# Altium PCB Board Connector Template.PcbDoc
Units mil, origin at the board's own origin, x right, y up, seen from the top; angles counter-clockwise.
Board outline 3937.01 x 3937.01 mil, 4 copper layers (Top Layer, Ground Plane, Power Plane, Bottom Layer), stack 62.449 mil thick; 8 components, 8 nets, 64 pads, 0 vias.
Unrouted connection lines stored in the file: 52.
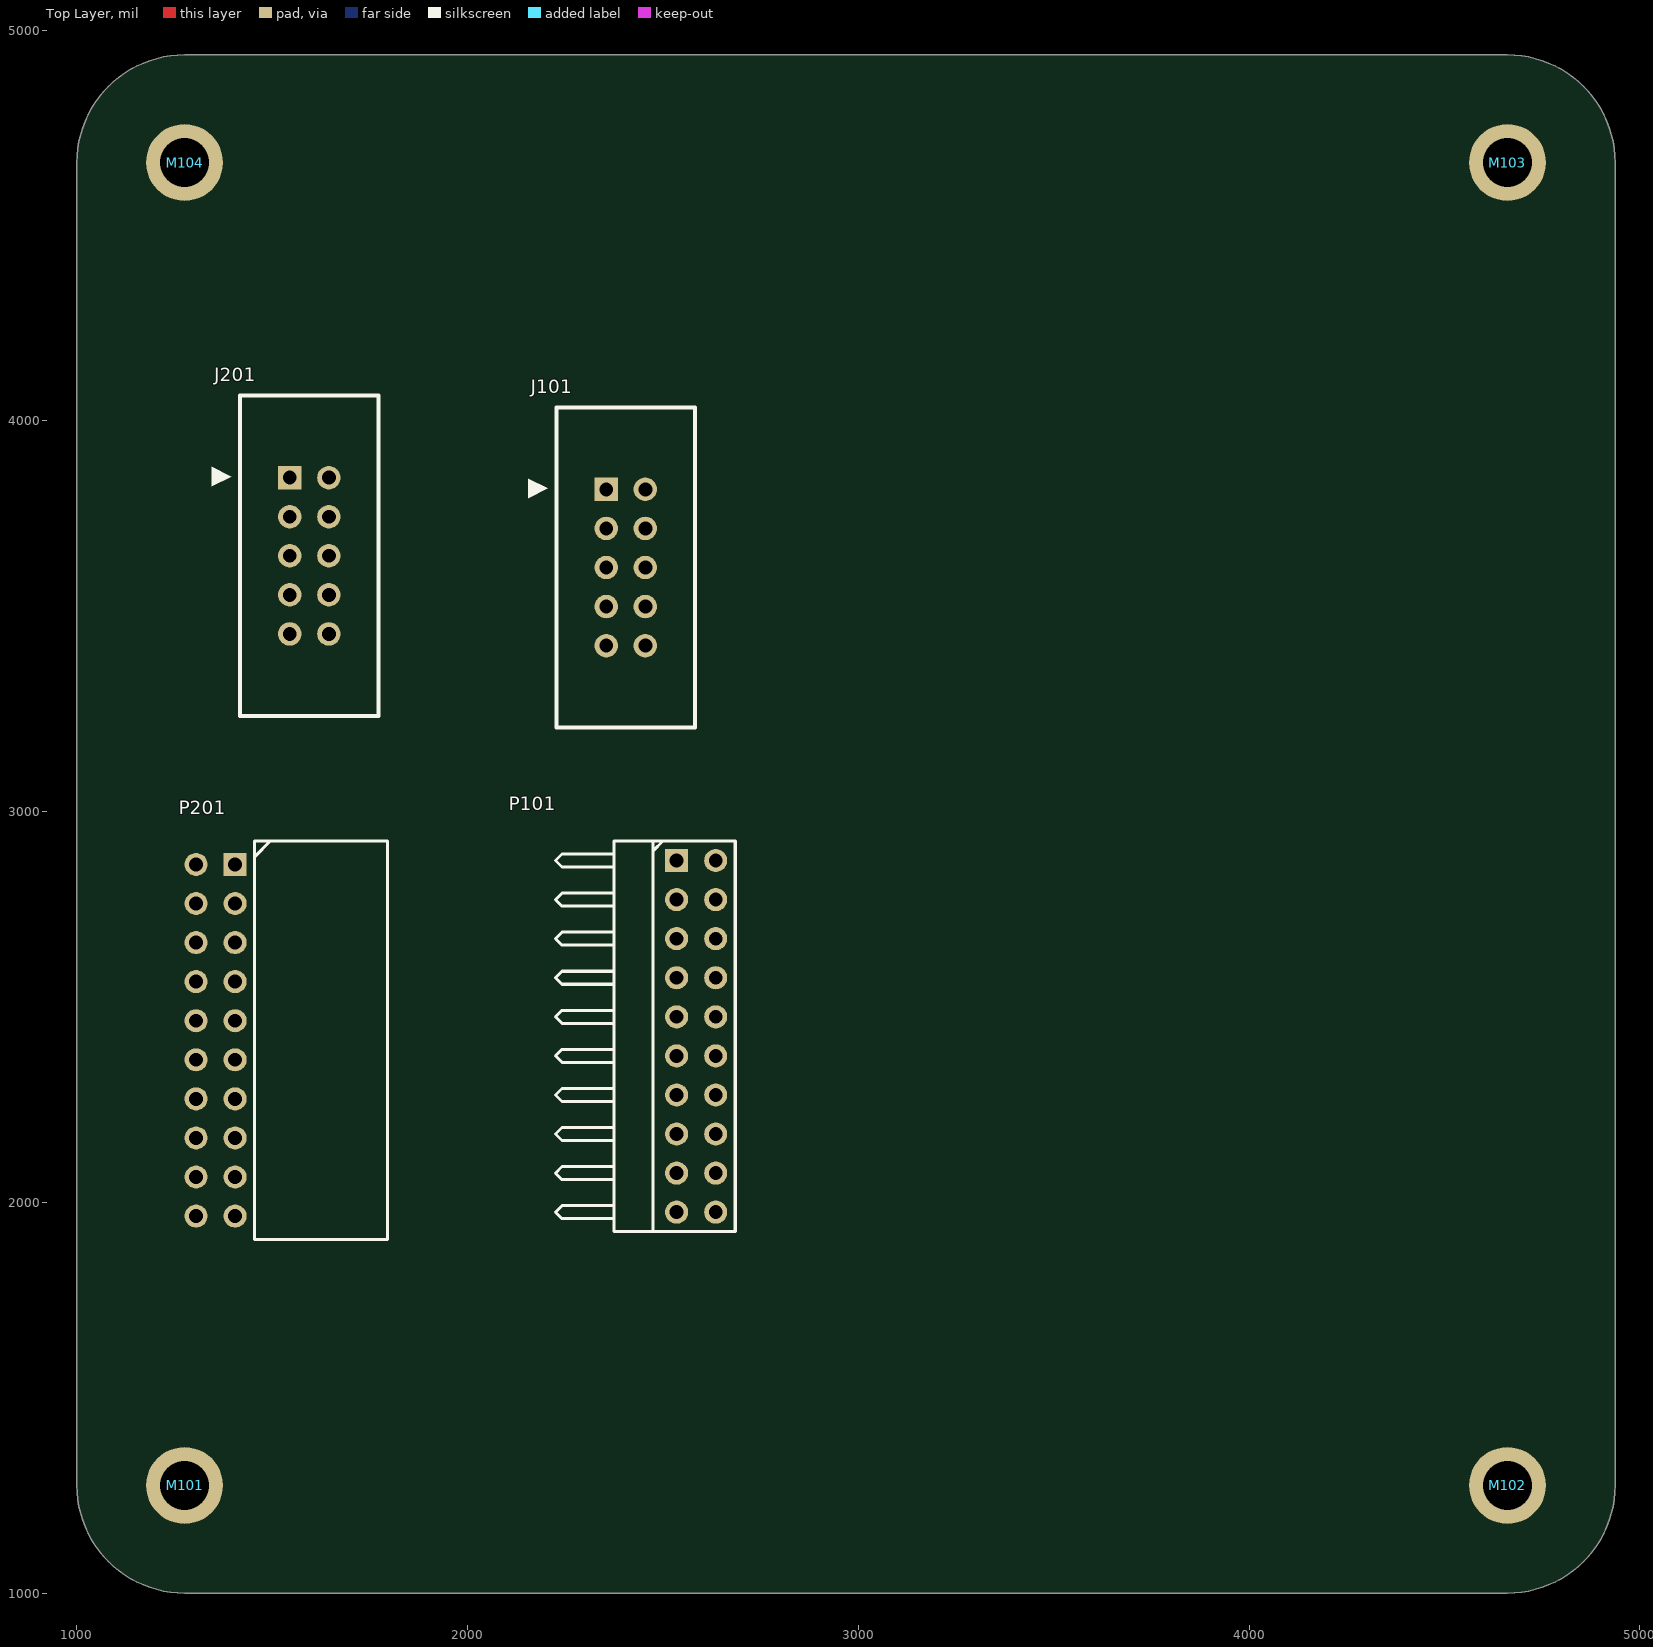
[diagram p0: Top Layer view]
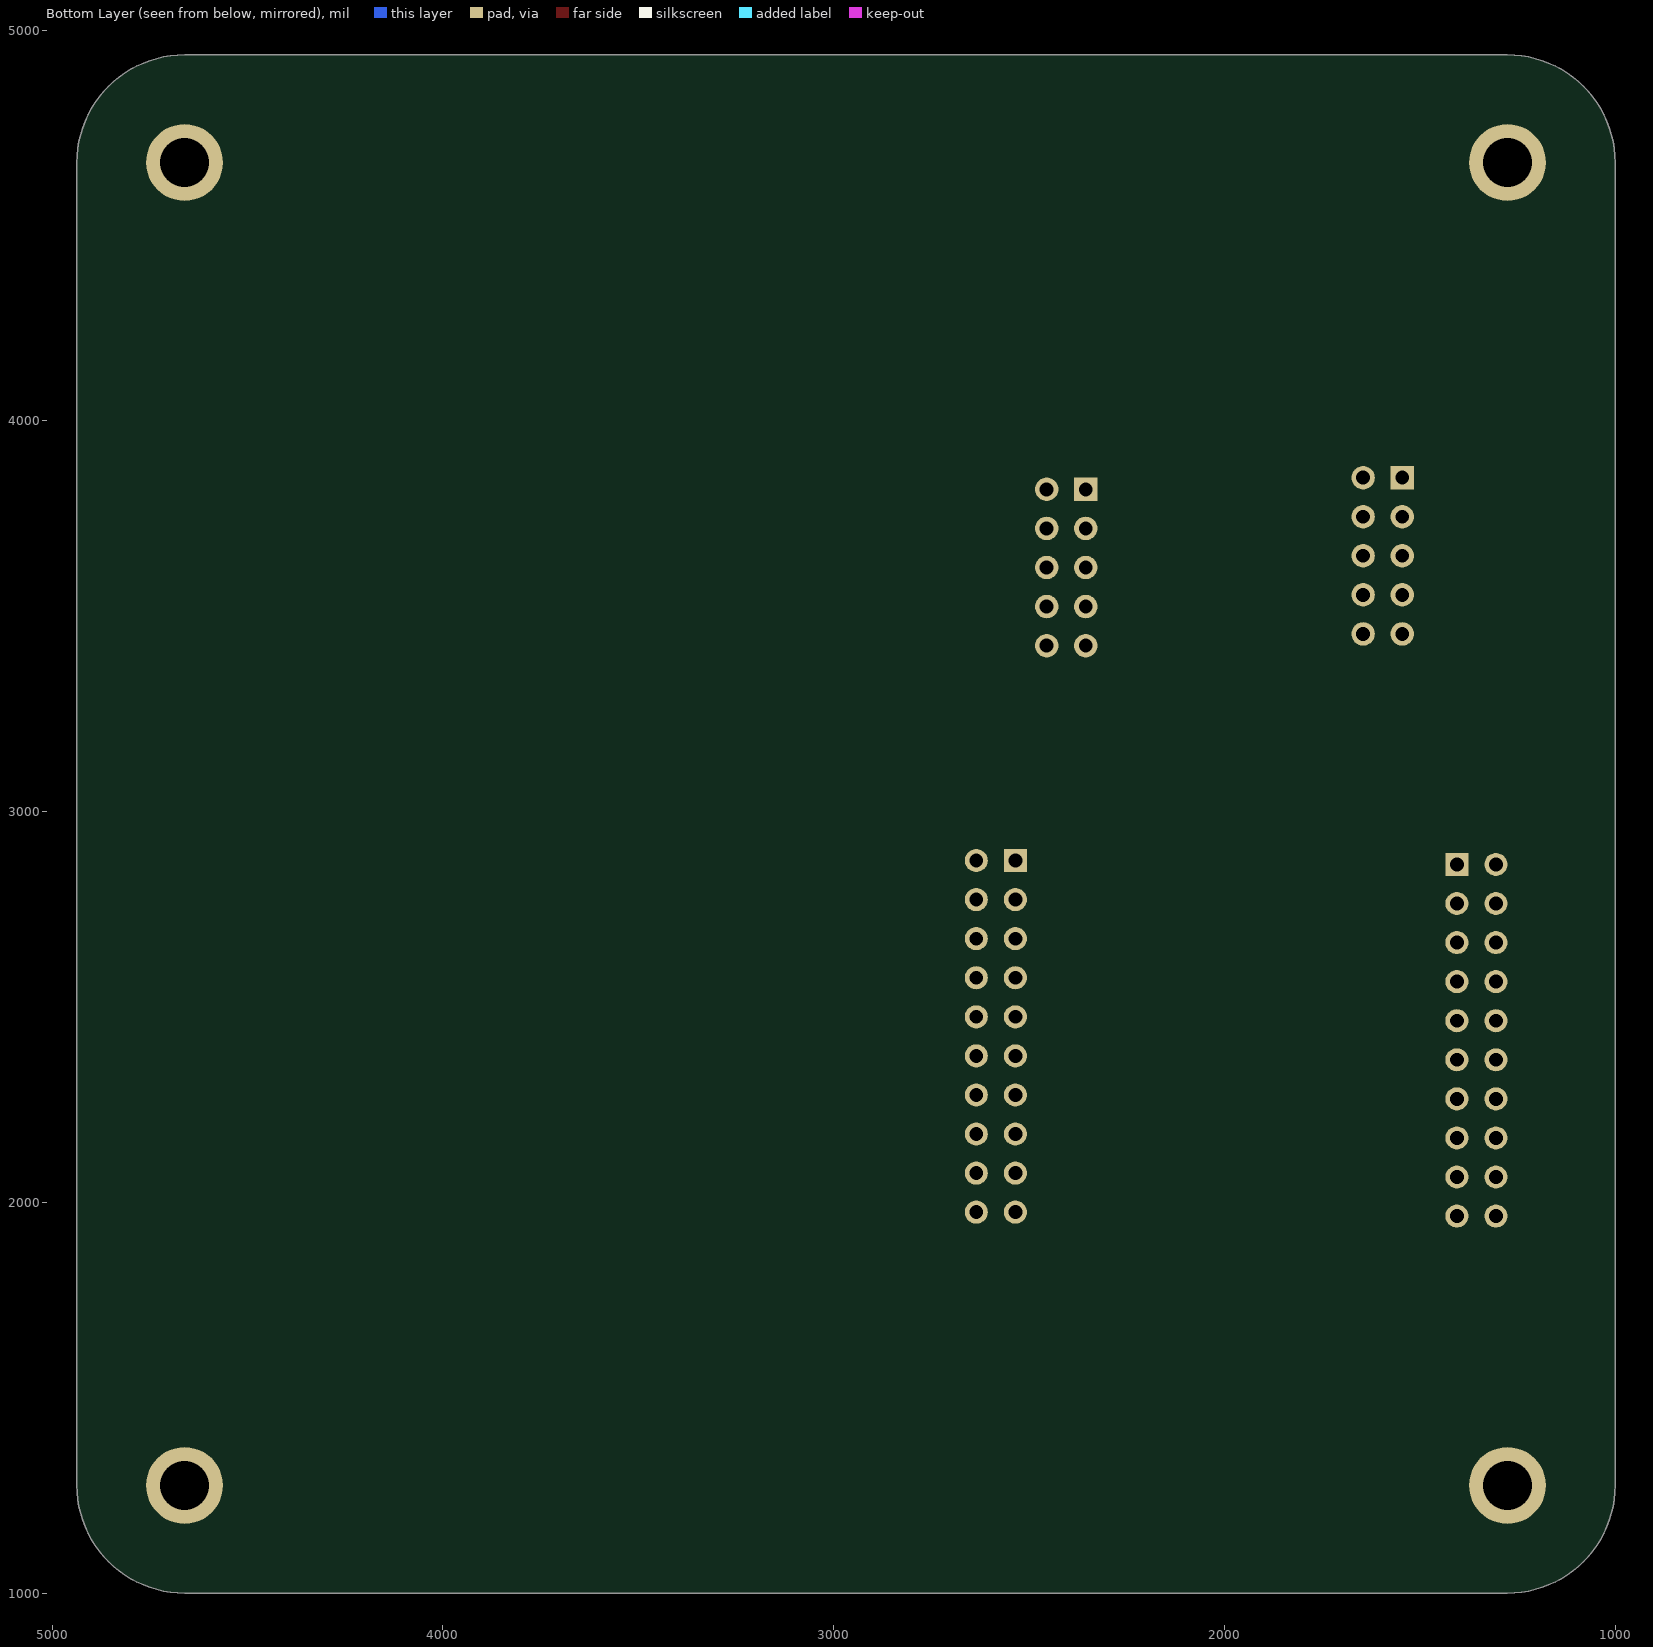
[diagram p1: Bottom Layer view, seen from below]
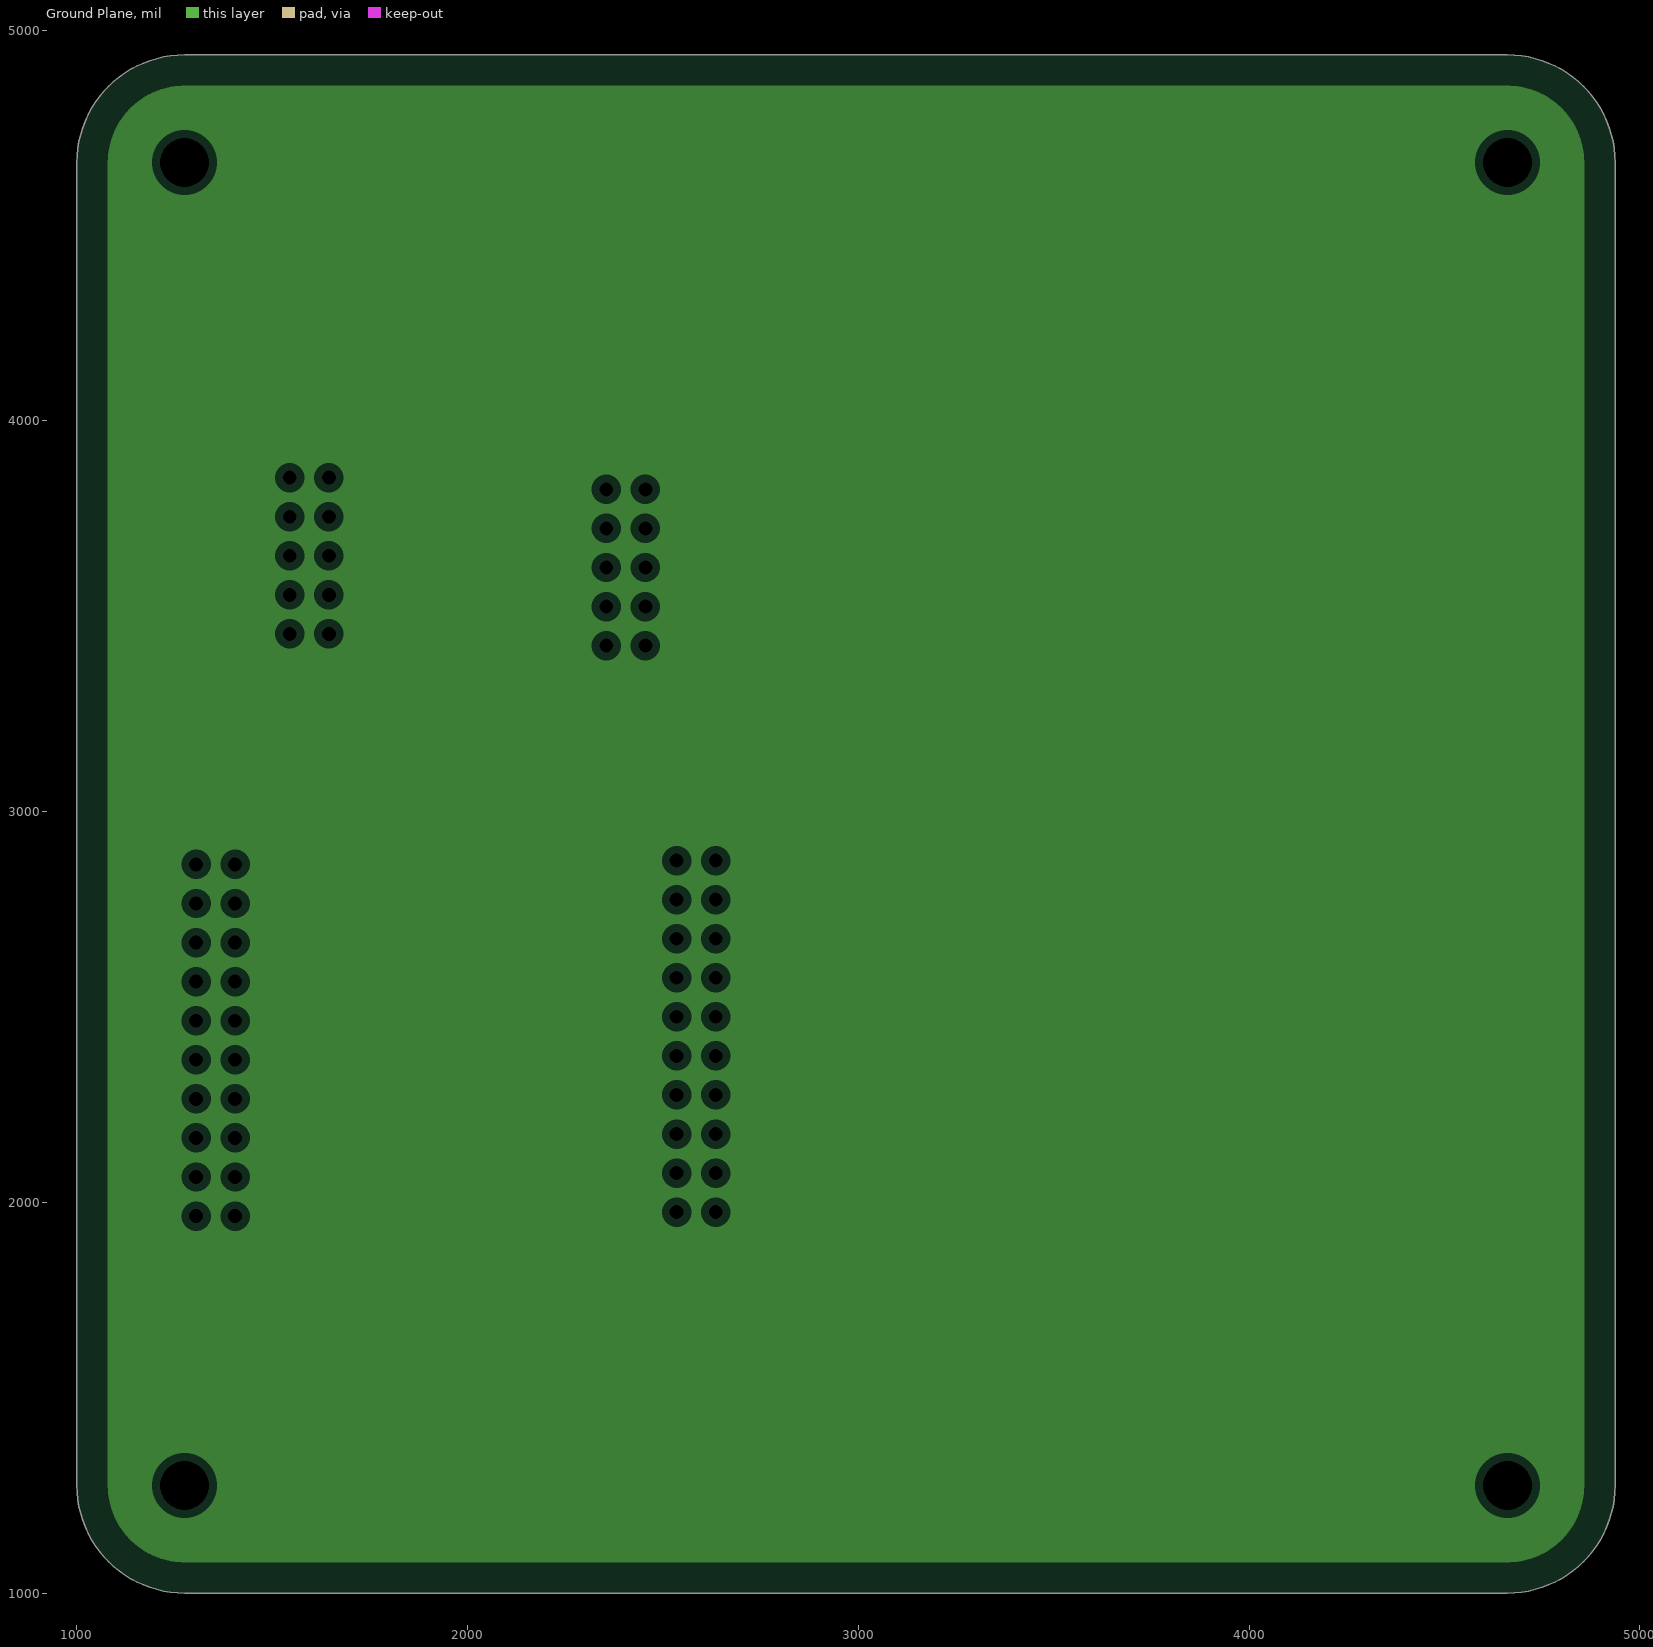
[diagram p2: Ground Plane, clearances drawn from the general rule]
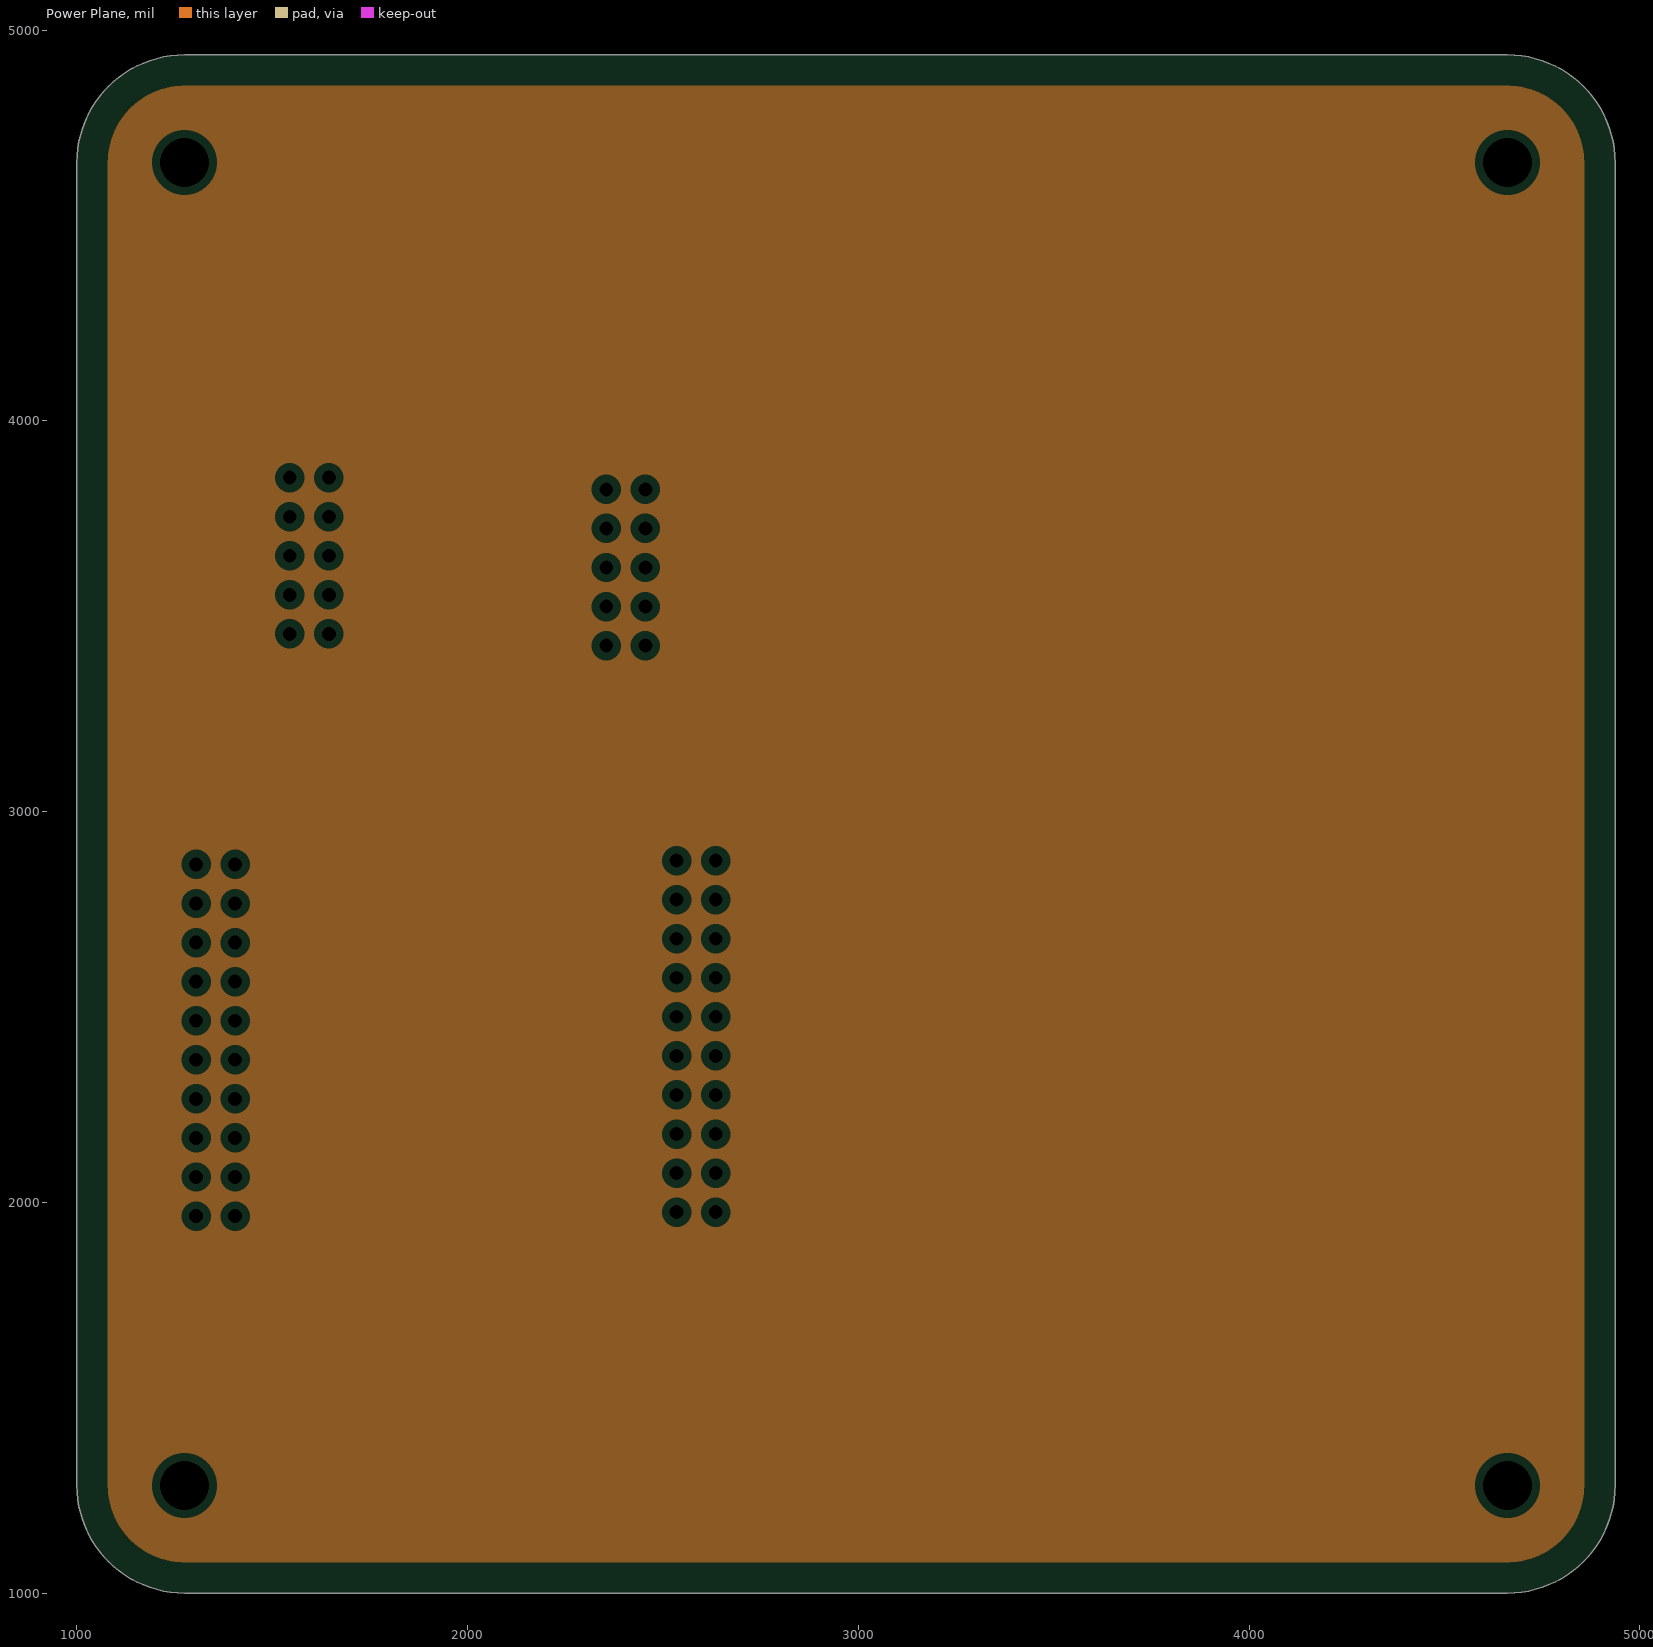
[diagram p3: Power Plane, clearances drawn from the general rule]

## Layer stack, top to bottom
Top Solder: solder mask 0.5, Solder Resist, Dk 3.8
Top Layer: signal copper 1.378
Dielectric 1: prepreg 8.284, 7628, Dk 4.5
Ground Plane: plane copper 0.598
Dielectric 3: core 41.929, FR-4, Dk 4.5
Power Plane: plane copper 0.598
Dielectric 4: prepreg 8.284, 7628, Dk 4.5
Bottom Layer: signal copper 1.378
Bottom Solder: solder mask 0.5, Solder Resist, Dk 3.8

## Board outline
1275.59,1000 cw(c1275.59,1275.59) 1000,1275.59 1000,4661.42 cw(c1275.59,4661.42) 1275.59,4937.01 4661.42,4937.01 cw(c4661.42,4661.42) 4937.01,4661.42 4937.01,1275.59 cw(c4661.42,1275.59) 4661.42,1000

## Design rules (kind name [scope] priority, off if disabled: settings)
Clearance [All] p1: gap=10 ignorepadtopadclearanceinfootprint=FALSE except(0: Arc-Hole Track-Hole SMDPad-Hole THPad-Hole Via-Hole Fill-Hole Poly-Hole Region-Hole Text-Hole)
PlaneClearance [All] p1: clearance=20
PlaneConnect [All] p1: planeconnectstyle=Relief reliefexpansion=20 reliefentries=4 reliefconductorwidth=10 reliefairgap=10
PolygonConnect [All] p1: connectstyle=Relief reliefconductorwidth=10 reliefentries=4 polygonreliefangle="90 Angle" airgapwidth=10
RoutingVias [All] p1: holewidth=28 width=50 viastyle="Through Hole" minholewidth=28 minwidth=50 maxholewidth=28 maxwidth=50
SolderMaskExpansion [All] p1: expansion=4
Width [All] p1: maxlimit=10 minlimit=10 preferedwidth=10
28 further rules are at their usual default settings.

## Components (designator, comment, footprint, x,y, rotation, side; value= is the part's Value field where it differs from the comment)
J101 "DC3-10P" DC3-10P 2405,3625 r0 top
J201 "DC3-10P" DC3-10P 1595,3655 r0 top
M101 "M3" M3-3.2X5 1275.59,1275.59 r0 top
M102 "M3" M3-3.2X5 4661.42,1275.59 r0 top
M103 "M3" M3-3.2X5 4661.42,4661.42 r0 top
M104 "M3" M3-3.2X5 1275.59,4661.42 r0 top
P101 "Header 10X2L" HDR2X10LML 2535,2875 r0 top
P201 "Header 10X2R" HDR2X10LFR 1405,2865 r0 top

## Footprints (in the part's own frame and the unit in brackets; to place one, negate y for a bottom-side part, rotate by r counter-clockwise, add the part's x,y. Pads: shape width x height; smd on the part's side, far side on the other; paste and mask are expansions set on the pad)
DC3-10P [mil]
  rect 60x60 hole 35.43: 1(-50,200)
  round 60 hole 35.43: 2(50,200) 3(-50,100) 4(50,100) 5(-50,0) 6(50,0) 7(-50,-100) 8(50,-100) 9(-50,-200) 10(50,-200)
  silkscreen extent -250,-410 177,410, body extent -173,-406 173,406, height 358
HDR2X10LFR [mm] "Connector; Header; 10x2 Position; Right Angle; Female; Pin 1 on Right;"
  rect 1.5x1.5 hole 0.9: 1(0,0)
  round 1.5 hole 0.9: 2(-2.54,0) 3(0,-2.54) 4(-2.54,-2.54) 5(0,-5.08) 6(-2.54,-5.08) 7(0,-7.62) 8(-2.54,-7.62) 9(0,-10.16) 10(-2.54,-10.16) 11(0,-12.7) 12(-2.54,-12.7) 13(0,-15.24) 14(-2.54,-15.24) 15(0,-17.78) 16(-2.54,-17.78) 17(0,-20.32) 18(-2.54,-20.32) 19(0,-22.86) 20(-2.54,-22.86)
  silkscreen extent 1.27,-24.38 9.91,1.52, body extent -2.79,-24.26 9.81,1.4, height 5.04
HDR2X10LML [mm] "Connector; Header; 10x2 Position; Right Angle; Male; Pin 1 on Left;"
  rect 1.5x1.5 hole 0.9: 1(0,0)
  round 1.5 hole 0.9: 2(2.54,0) 3(0,-2.54) 4(2.54,-2.54) 5(0,-5.08) 6(2.54,-5.08) 7(0,-7.62) 8(2.54,-7.62) 9(0,-10.16) 10(2.54,-10.16) 11(0,-12.7) 12(2.54,-12.7) 13(0,-15.24) 14(2.54,-15.24) 15(0,-17.78) 16(2.54,-17.78) 17(0,-20.32) 18(2.54,-20.32) 19(0,-22.86) 20(2.54,-22.86)
  silkscreen extent -7.87,-24.13 3.81,1.27, body extent -10.06,-24.13 2.83,1.27, height 1.22
M3-3.2X5 [mm]
  round 5 hole 3.2: ""(0,0)

## Part data
P101: "Header, 10-Pin, Dual row, Pin 1 on Left"
P201: "Header, 10-Pin, Dual row, Pin 1 on Right"

## Nets (pads, with @x,y where several pads share a name; then routed paths per layer and width w, separated by ;. In a path a pad name is that pad's centre, name@x,y a point inside that pad or via, vN(x,y) a via of type N, cw(c..) or ccw(c..) an arc to the next point about the centre after c; other vN are vias at no path point)
DC24V: P101.4 P201.3
DC+3V3: J101.7 J201.7 P101.16 P101.18 P201.15 P201.17
DC+6V5: J101.5 J201.5 P101.14 P201.13
DC+18V: J101.1 J201.1 P101.10 P201.9
DC+19V5: P101.6 P201.5
DC-18V: J101.3 J201.3 P101.12 P201.11
DC-19V5: P101.8 P201.7
GND: J101.2 J101.4 J101.6 J101.8 J101.9 J101.10 J201.2 J201.4 J201.6 J201.8 J201.9 J201.10 P101.1 P101.2 P101.3 P101.5 P101.7 P101.9 P101.11 P101.13 P101.15 P101.17 P101.19 P101.20 P201.1 P201.2 P201.4 P201.6 P201.8 P201.10 P201.12 P201.14 P201.16 P201.18 P201.19 P201.20
pads on no net: M101. M102. M103. M104.

## Polygon pours and split planes (outlines as drawn)
no net on Ground Plane (split plane): 4673.3,4857.9 4685.14,4856.82 4696.9,4855.03 4708.52,4852.54 4719.98,4849.34 4731.22,4845.47 4742.2,4840.92 4752.89,4835.71 4763.25,4829.87 4773.24,4823.41 4782.81,4816.37 4791.95,4808.75 4800.6,4800.6 4808.75,4791.95 4816.37,4782.81 4823.41,4773.24 4829.87,4763.25 4835.71,4752.89 4840.92,4742.2 4845.47,4731.22 4849.34,4719.98 4852.54,4708.52 4855.03,4696.9 4856.82,4685.14 4857.9,4673.3 4858.23,4662.49 4858.17,4661.42 4858.17,1275.59 4858.23,1274.52 4857.9,1263.71 4856.82,1251.86 4855.03,1240.11 4852.54,1228.48 4849.34,1217.03 4845.47,1205.79 4840.92,1194.8 4835.71,1184.11 4829.87,1173.76 4823.41,1163.77 4816.37,1154.2 4808.75,1145.06 4800.6,1136.4 4791.95,1128.25 4782.81,1120.64 4773.24,1113.59 4763.25,1107.14 4752.89,1101.3 4742.2,1096.09 4731.22,1091.54 4719.98,1087.66 4708.52,1084.47 4696.9,1081.97 4685.14,1080.19 4673.3,1079.11 4662.49,1078.78 4661.42,1078.84 1275.59,1078.84 1274.52,1078.78 1263.71,1079.11 1251.86,1080.19 1240.11,1081.97 1228.48,1084.47 1217.03,1087.66 1205.79,1091.54 1194.8,1096.09 1184.11,1101.3 1173.76,1107.14 1163.77,1113.59 1154.2,1120.64 1145.06,1128.25 1136.4,1136.4 1128.25,1145.06 1120.64,1154.2 1113.59,1163.77 1107.14,1173.76 1101.3,1184.11 1096.09,1194.8 1091.54,1205.79 1087.66,1217.03 1084.47,1228.48 1081.97,1240.11 1080.19,1251.86 1079.11,1263.71 1078.78,1274.52 1078.84,1275.59 1078.84,4661.42 1078.78,4662.49 1079.11,4673.3 1080.19,4685.14 1081.97,4696.9 1084.47,4708.52 1087.66,4719.98 1091.54,4731.22 1096.09,4742.2 1101.3,4752.89 1107.14,4763.25 1113.59,4773.24 1120.64,4782.81 1128.25,4791.95 1136.4,4800.6 1145.06,4808.75 1154.2,4816.37 1163.77,4823.41 1173.76,4829.87 1184.11,4835.71 1194.8,4840.92 1205.79,4845.47 1217.03,4849.34 1228.48,4852.54 1240.11,4855.03 1251.86,4856.82 1263.71,4857.9 1274.52,4858.23 1275.59,4858.17 4661.42,4858.17 4662.49,4858.23
no net on Power Plane (split plane): 4673.3,4857.9 4685.14,4856.82 4696.9,4855.03 4708.52,4852.54 4719.98,4849.34 4731.22,4845.47 4742.2,4840.92 4752.89,4835.71 4763.25,4829.87 4773.24,4823.41 4782.81,4816.37 4791.95,4808.75 4800.6,4800.6 4808.75,4791.95 4816.37,4782.81 4823.41,4773.24 4829.87,4763.25 4835.71,4752.89 4840.92,4742.2 4845.47,4731.22 4849.34,4719.98 4852.54,4708.52 4855.03,4696.9 4856.82,4685.14 4857.9,4673.3 4858.23,4662.49 4858.17,4661.42 4858.17,1275.59 4858.23,1274.52 4857.9,1263.71 4856.82,1251.86 4855.03,1240.11 4852.54,1228.48 4849.34,1217.03 4845.47,1205.79 4840.92,1194.8 4835.71,1184.11 4829.87,1173.76 4823.41,1163.77 4816.37,1154.2 4808.75,1145.06 4800.6,1136.4 4791.95,1128.25 4782.81,1120.64 4773.24,1113.59 4763.25,1107.14 4752.89,1101.3 4742.2,1096.09 4731.22,1091.54 4719.98,1087.66 4708.52,1084.47 4696.9,1081.97 4685.14,1080.19 4673.3,1079.11 4662.49,1078.78 4661.42,1078.84 1275.59,1078.84 1274.52,1078.78 1263.71,1079.11 1251.86,1080.19 1240.11,1081.97 1228.48,1084.47 1217.03,1087.66 1205.79,1091.54 1194.8,1096.09 1184.11,1101.3 1173.76,1107.14 1163.77,1113.59 1154.2,1120.64 1145.06,1128.25 1136.4,1136.4 1128.25,1145.06 1120.64,1154.2 1113.59,1163.77 1107.14,1173.76 1101.3,1184.11 1096.09,1194.8 1091.54,1205.79 1087.66,1217.03 1084.47,1228.48 1081.97,1240.11 1080.19,1251.86 1079.11,1263.71 1078.78,1274.52 1078.84,1275.59 1078.84,4661.42 1078.78,4662.49 1079.11,4673.3 1080.19,4685.14 1081.97,4696.9 1084.47,4708.52 1087.66,4719.98 1091.54,4731.22 1096.09,4742.2 1101.3,4752.89 1107.14,4763.25 1113.59,4773.24 1120.64,4782.81 1128.25,4791.95 1136.4,4800.6 1145.06,4808.75 1154.2,4816.37 1163.77,4823.41 1173.76,4829.87 1184.11,4835.71 1194.8,4840.92 1205.79,4845.47 1217.03,4849.34 1228.48,4852.54 1240.11,4855.03 1251.86,4856.82 1263.71,4857.9 1274.52,4858.23 1275.59,4858.17 4661.42,4858.17 4662.49,4858.23

## Silkscreen, mask and mechanical layers (free items; w line width, h text height)
Mechanical 1:
  the board outline again, w10

## Text inside footprints (layer, text, board x,y; h text height)
P101: Mechanical 1 "PCB Edge" at 2105,1885 h32
P201: Mechanical 1 "PCB Edge" at 1775,1915 h32 r90